# Altium PCB EmphaseMainBoardX.PcbDoc
Units mil, origin at the board's own origin, x right, y up, seen from the top; angles counter-clockwise.
Board outline 6000 x 4000 mil, 2 copper layers (Top Layer, Bottom Layer); 86 components, 128 nets, 468 pads, 0 vias.
Unrouted connection lines stored in the file: 286.
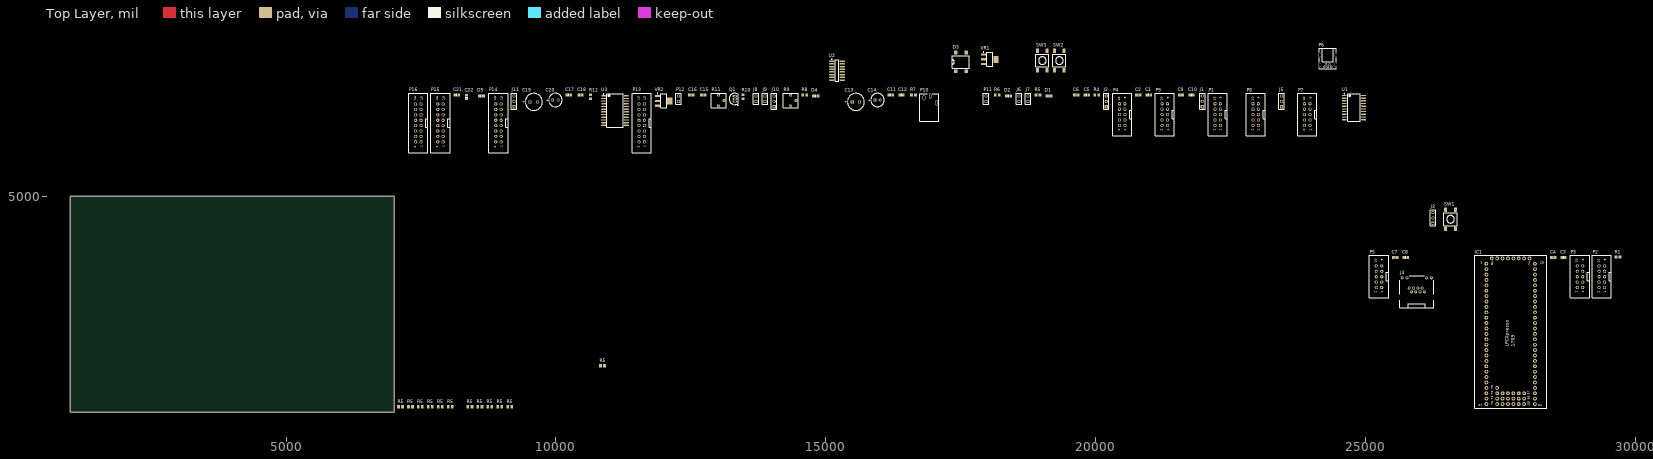
[diagram p0: Top Layer view]
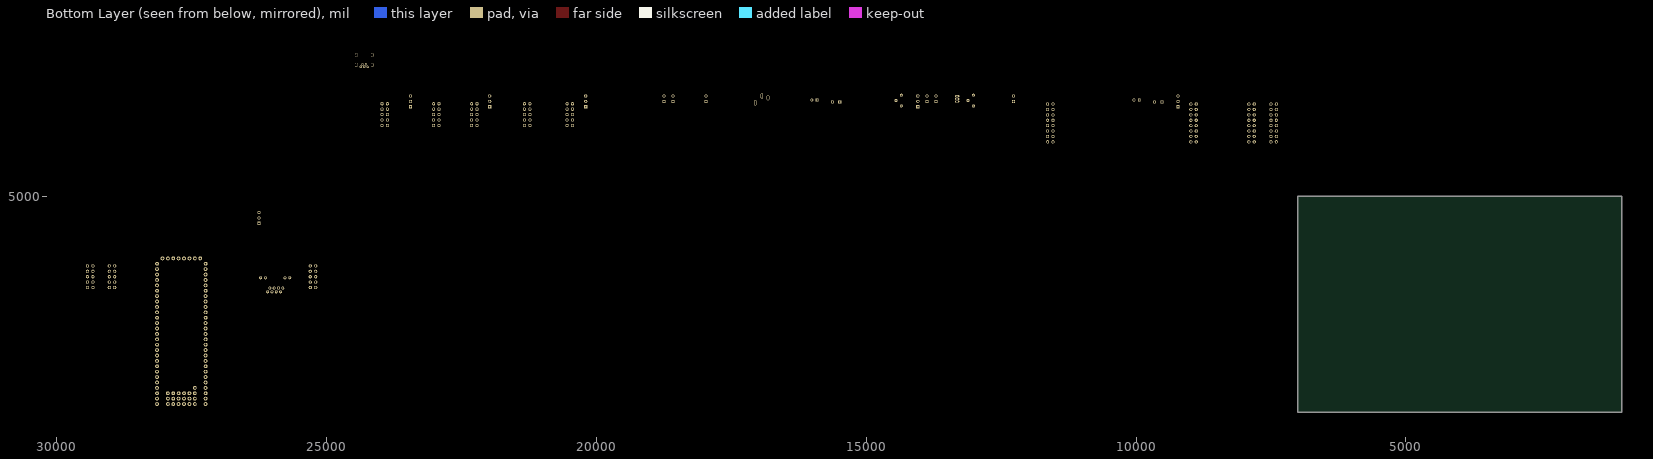
[diagram p1: Bottom Layer view, seen from below]

## Layer stack, top to bottom
Top Layer: signal copper 1.4
Dielectric: dielectric 12.6, FR-4, Dk 4.8
Bottom Layer: signal copper 1.4

## Board outline
1000,1000 7000,1000 7000,5000 1000,5000

## Design rules (kind name [scope] priority, off if disabled: settings)
Clearance [All] p1: gap=10
DiffPairsRouting [All] p1: maxlimit=10 minlimit=10 mostfreqgap=10 maxuncoupledlength=500
Height [All] p1: minheight=0 maxheight=1968.5 prefheight=500
PolygonConnect [All] p1: connectstyle=Relief reliefconductorwidth=10 reliefentries=4 polygonreliefangle="90 Angle" airgapwidth=10
RoomDefinition EmphaseMainBoard [InComponentClass('EmphaseMainBoard')] p1: confinementstyle=ConfineIn formatcopy=TRUE lockcomponents=FALSE outline 7045,1060 9220,1060 9220,1240 7045,1240
RoutingVias [All] p1: holewidth=28 width=50 viastyle="Through Hole" minholewidth=28 minwidth=50 maxholewidth=28 maxwidth=50
SilkscreenOverComponentPads [All] p1: minsilkscreentomaskgap=10
SolderMaskExpansion [All] p1: expansion=4
Width [All] p1: maxlimit=10 minlimit=10 preferedwidth=10
25 further rules are at their usual default settings.

## Classes and differential pairs
net class LCD_D[0..7]: LCD_D0 LCD_D1 LCD_D2 LCD_D3 LCD_D4 LCD_D5 LCD_D6 LCD_D7
net class ADC_0.[0..7]: ADC_0.0 ADC_0.1 ADC_0.2 ADC_0.3 ADC_0.4 ADC_0.5 ADC_0.6 ADC_0.7
component class EmphaseMainBoard: C1 C2 C3 C4 C5 C6 C7 C8 C9 C10 C11 C12 C13 C14 C15 C16 C17 C18 C19 C20 C21 C22 D1 D2 D3 D4 D5 IC1 J1 J2 J3 J4 J5 J6 J7 J8 J9 J10 J11 P1 P2 P3 P4 P5 P6 P7 P8 P9 P10 P11 P12 P13 P14 P15 P16 Q1 R1 R4 R5 R6 R7 R8 R9 R10 R11 R12 SW1 SW2 SW3 U1 U2 U3 VR1 VR2
differential pair USB_D: +USB_D_P -USB_D_N
differential pair ETH_TD: +ETH_TD_P -ETH_TD_N
differential pair ETH_RD: +ETH_RD_P -ETH_RD_N

## Components (designator, comment, footprint, x,y, rotation, side; value= is the part's Value field where it differs from the comment)
C1 "Cap Pol1" 6-0805_N 20985,6875 r0 top
C2 "Cap Semi" 6-0805_N 20795,6875 r0 top
C3 "Cap Semi" 6-0805_N 28675,3870 r0 top
C4 "Cap Pol1" 6-0805_N 28485,3870 r0 top
C5 "Cap Pol1" 6-0805_N 19840,6875 r0 top
C6 "Cap Semi" 6-0805_N 19645,6875 r0 top
C7 "Cap Semi" 6-0805_N 25555,3870 r0 top
C8 "Cap Semi" 6-0805_N 25750,3870 r0 top
C9 "Cap Semi" 6-0805_N 21585,6875 r0 top
C10 "Cap Semi" 6-0805_N 21780,6875 r0 top
C11 "Cap Semi" 6-0805_N 16205,6875 r0 top
C12 "Cap Semi" 6-0805_N 16405,6875 r0 top
C13 "Cap Pol1" CAPPR3.5-8x20 15560,6750 r0 top
C14 "Cap Pol1" CAPPR2.5-6.3x11 15960,6785 r0 top
C15 "Cap Semi" 6-0805_N 12730,6875 r0 top
C16 "Cap Pol1" 6-0805_N 12510,6875 r0 top
C17 "Cap Semi" 6-0805_N 10235,6875 r0 top
C18 "Cap Semi" 6-0805_N 10455,6875 r0 top
C19 "Cap Pol1" CAPPR3.5-8x20 9590,6750 r0 top
C20 "Cap Pol1" CAPPR2.5-6.3x11 9990,6785 r0 top
C21 "Cap Semi" 6-0805_N 8160,6875 r0 top
C22 "Cap Semi" 6-0805_N 8340,6840 r90 top
D1 "LED_Task_Overrun" 6-0805_M 19140,6860 r0 top
D2 "LED_Error" 6-0805_M 18390,6860 r0 top
D3 "Bridge Rectifier" SDIP 17505,7490 r90 top
D4 "LED_5V_Good" 6-0805_M 14815,6860 r0 top
D5 "LED_3V3_Good" 6-0805_M 8620,6860 r0 top
IC1 "" LPCXpresso1769 27695,2450 r0 top
J1 "VSEL_SPARE_A" HDR1X3 21980,6660 r90 top
J2 "VSEL_SPARE_B" HDR1X3 20200,6660 r90 top
J3 "Jumper" HDR1X3 26255,4500 r90 top
J4 "Ethernet" "Amphenol RJ45" 25955,3130 r0 top
J5 "Jumper" HDR1X3 23445,6660 r90 top
J6 "5V InCurrent" HDR1X2 18580,6760 r90 top
J7 "5V OutCurrent" HDR1X2 18750,6760 r90 top
J8 "3.3V InCurrent" HDR1X2 13705,6760 r90 top
J9 "3.3V OutCurrent" HDR1X2 13875,6760 r90 top
J10 "Jumper" HDR1X3 14045,6660 r90 top
J11 "Jumper" HDR1X3 9220,6660 r90 top
P1 "SPARE_A" "10 pol Header" 22265,6515 r90 top
P2 "JTAG" "10 pol Header" 29385,3510 r90 top
P3 "SPARE_UARTS" "10 pol Header" 28980,3510 r90 top
P4 "SPARE_B" "10 pol Header" 20495,6515 r90 top
P5 "DIO" "10 pol Header" 25255,3510 r90 top
P6 "Mini USB" "Mini USB Socket - Typ B" 24305,7400 r0 top
P7 "SPI_ADC" "10 pol Header" 23925,6515 r90 top
P8 "ADC_A" "10 pol Header" 22970,6515 r90 top
P9 "ADC_B" "10 pol Header" 21285,6515 r90 top
P10 "Lumberg Power Con" LumbergPowerCon 16900,6550 r90 top
P11 "5V Supply" HDR1X2 17970,6760 r90 top
P12 "3V3 Supply" HDR1X2 12270,6760 r90 top
P13 "16 pol Header" "16 pol Header" 11590,6360 r90 top
P14 "16 pol Header" "16 pol Header" 8935,6360 r90 top
P15 "16 pol Header" "16 pol Header" 7860,6360 r90 top
P16 "16 pol Header" "16 pol Header" 7450,6360 r90 top
Q1 "BC337" TO-226-AA 13315,6805 r0 top
R1 "Res2" 6-0805 29685,3875 r0 top
R4 "Res2" 6-0805 20025,6880 r0 top
R5 "Res2" 6-0805 9145,1100 r0 top
R5 "Res2" 6-0805 8960,1100 r0 top
R5 "Res2" 6-0805 8775,1100 r0 top
R5 "Res2" 6-0805 8590,1100 r0 top
R5 "Res2" 6-0805 8405,1100 r0 top
R5 "Res2" 6-0805 8040,1100 r0 top
R5 "Res2" 6-0805 10865,1860 r0 top
R5 "Res2" 6-0805 7855,1100 r0 top
R5 "Res2" 6-0805 7670,1100 r0 top
R5 "Res2" 6-0805 7485,1100 r0 top
R5 "Res2" 6-0805 7305,1100 r0 top
R5 "Res2" 6-0805 7120,1100 r0 top
R5 "Res2" 6-0805 18935,6880 r0 top
R6 "Res2" 6-0805 18180,6880 r0 top
R7 "Res2" 6-0805 16625,6880 r0 top
R8 "Res2" 6-0805 14610,6880 r0 top
R9 "Contrast" MiniPot 14450,6775 r0 top
R10 "Res2" 6-0805 13465,6845 r90 top
R11 "Luminance" MiniPot 13115,6775 r0 top
R12 "Res2" 6-0805 10640,6845 r90 top
SW1 "CPU_Reset" "SMD Switch" 26580,4575 r90 top
SW2 "ISP_Reset" "SMD Switch" 19330,7515 r90 top
SW3 "Task_Error_Reset" "SMD Switch" 19015,7515 r90 top
U1 "SN74HC541DW" DW020_N 24790,6645 r0 top
U2 "SN74HC595D" D016_M 15210,7330 r0 top
U3 "SN74HC154DW" SOIC127P1199-24AN 11095,6590 r0 top
VR1 "5 V" SOT223-4N 18040,7540 r0 top
VR2 "3.3 V" SOT223-4N 11995,6770 r0 top

## Footprints (in the part's own frame and the unit in brackets; to place one, negate y for a bottom-side part, rotate by r counter-clockwise, add the part's x,y. Pads: shape width x height; smd on the part's side, far side on the other; paste and mask are expansions set on the pad)
6-0805 [mm] "Chip Resistor; Body 2 x 1.2 mm (LxW typ)"
  rect 1.3x1.5 smd: 1(-0.95,0) 2(0.95,0)
6-0805_M [mm] "Chip Resistor, Body 2.0x1.2mm, IPC Low Density"
  rect 1.4x1.5 smd: 1(-1,0) 2(1,0)
  silkscreen extent 0,-0.65 0,0.65, body extent -1.07,-0.7 1.07,0.7, height 0.7
6-0805_N [mm] "Chip Resistor, Body 2.0x1.2mm, IPC Medium Density"
  rect 1.2x1.4 smd: 1(-0.9,0) 2(0.9,0)
  silkscreen extent 0,-0.6 0,0.6, body extent -1.07,-0.7 1.07,0.7, height 0.7
"10 pol Header" [mm]
  round 1.5 hole 0.9: 1(-5.08,-1.27) 2(-5.08,1.27) 3(-2.54,-1.27) 4(-2.54,1.27) 5(0,-1.27) 6(0,1.27) 7(2.54,-1.27) 8(2.54,1.27) 9(5.08,-1.27) 10(5.08,1.27)
  silkscreen extent -10,-4.5 10,4.5, body extent -10,-4.5 10,4.5, height 9
"16 pol Header" [mm]
  round 1.5 hole 0.9: 1(-8.89,-1.27) 2(-8.89,1.27) 3(-6.35,-1.27) 4(-6.35,1.27) 5(-3.81,-1.27) 6(-3.81,1.27) 7(-1.27,-1.27) 8(-1.27,1.27) 9(1.27,-1.27) 10(1.27,1.27) 11(3.81,-1.27) 12(3.81,1.27) 13(6.35,-1.27) 14(6.35,1.27) 14(8.89,1.27) 15(8.89,-1.27)
  silkscreen extent -14,-4.5 14,4.5, body extent -14,-4.5 14,4.5, height 9
"Amphenol RJ45" [mm]
  round 0 hole 3.3: 0(-6.35,0) 0(6.35,0)
  round 1.4 hole 0.8: 1(3.556,2.54) 2(2.54,4.318) 3(1.524,2.54) 4(0.508,4.318) 5(-0.508,2.54) 6(-1.524,4.318) 7(-2.54,2.54) 8(-3.556,4.318) 9(6.858,9.144) 10(4.572,9.144) 11(-4.572,9.144) 12(-6.858,9.144)
  silkscreen extent -8,-5 8,10
CAPPR2.5-6.3x11 [mm] "Capacitor, Electrolytic, Radial; Body 6.3 x 11 mm (Dia.xH typ); Pin Spacing 2.5 mm (typ)"
  rect 1.35x1.35 hole 0.8: 1(-1.25,0)
  round 1.35 hole 0.8: 2(1.25,0)
  silkscreen extent -3.15,-3.15 3.15,3.15
CAPPR3.5-8x20 [mm] "Capacitor, Electrolytic, Radial; Body 8 x 20 mm (Dia.xH typ); Pin Spacing 3.5 mm (typ)"
  rect 1.5x1.5 hole 0.9: 1(-1.75,0)
  round 1.5 hole 0.9: 2(1.75,0)
  silkscreen extent -4,-4 4,4
D016_M [mm] "SOIC, 16-Leads, Body 9.9x3.9mm, Pitch 1.27mm, IPC Low Density"
  oval 2.5x0.7 smd: 1(-2.45,4.445) 2(-2.45,3.175) 3(-2.45,1.905) 4(-2.45,0.635) 5(-2.45,-0.635) 6(-2.45,-1.905) 7(-2.45,-3.175) 8(-2.45,-4.445) 9(2.45,-4.445) 10(2.45,-3.175) 11(2.45,-1.905) 12(2.45,-0.635) 13(2.45,0.635) 14(2.45,1.905) 15(2.45,3.175) 16(2.45,4.445)
  silkscreen extent -2.57,-5 0.8,5.47, body extent -2,-5 2,5, height 1.75
DW020_N [mm] "SOIC, 20-Leads, Body 12.8x7.5mm, Pitch 1.27mm, IPC Medium Density"
  oval 2.3x0.6 smd: 1(-4.55,5.715) 2(-4.55,4.445) 3(-4.55,3.175) 4(-4.55,1.905) 5(-4.55,0.635) 6(-4.55,-0.635) 7(-4.55,-1.905) 8(-4.55,-3.175) 9(-4.55,-4.445) 10(-4.55,-5.715) 11(4.55,-5.715) 12(4.55,-4.445) 13(4.55,-3.175) 14(4.55,-1.905) 15(4.55,-0.635) 16(4.55,0.635) 17(4.55,1.905) 18(4.55,3.175) 19(4.55,4.445) 20(4.55,5.715)
  silkscreen extent -4.67,-6.5 3,6.69, body extent -3.75,-6.5 3.75,6.5, height 2.65
HDR1X2 [mm] "Connector; Header; 2 Position"
  rect 1.5x1.5 hole 0.9: 1(0,0)
  round 1.5 hole 0.9: 2(2.54,0)
  silkscreen extent -1.27,-1.27 3.81,1.27
HDR1X3 [mm] "Connector; Header; 3 Position"
  rect 1.5x1.5 hole 0.9: 1(0,0)
  round 1.5 hole 0.9: 2(2.54,0) 3(5.08,0)
  silkscreen extent -1.27,-1.27 6.35,1.27
LPCXpresso1769 [mm]
  round 1.8 hole 0.9: 1(-11.43,33.02) 2(-11.43,30.48) 3(-11.43,27.94) 4(-11.43,25.4) 5(-11.43,22.86) 6(-11.43,20.32) 7(-11.43,17.78) 8(-11.43,15.24) 9(-11.43,12.7) 10(-11.43,10.16) 11(-11.43,7.62) 12(-11.43,5.08) 13(-11.43,2.54) 14(-11.43,0) 15(-11.43,-2.54) 16(-11.43,-5.08) 17(-11.43,-7.62) 18(-11.43,-10.16) 19(-11.43,-12.7) 20(-11.43,-15.24) 21(-11.43,-17.78) 22(-11.43,-20.32) 23(-11.43,-25.4) 24(-11.43,-22.86) 25(-11.43,-27.94) 26(-11.43,-30.48) 27(-11.43,-33.02) 28(11.43,33.02) 29(11.43,30.48) 30(11.43,27.94) 31(11.43,25.4) 32(11.43,22.86) 33(11.43,20.32) 34(11.43,17.78) 35(11.43,15.24) 36(11.43,12.7) 37(11.43,10.16) 38(11.43,7.62) 39(11.43,5.08) 40(11.43,2.54) 41(11.43,0) 42(11.43,-2.54) 43(11.43,-5.08) 44(11.43,-7.62) 45(11.43,-10.16) 46(11.43,-12.7) 47(11.43,-15.24) 48(11.43,-17.78) 49(11.43,-20.32) 50(11.43,-22.86) 51(11.43,-25.4) 52(11.43,-27.94) 53(11.43,-30.48) 54(11.43,-33.02) 55(6.35,-33.02) 56(6.35,-30.48) 57(6.35,-27.94) 58(3.81,-33.02) 59(3.81,-30.48) 60(3.81,-27.94) 61(1.27,-33.02) 62(1.27,-30.48) 63(1.27,-27.94) 64(-1.27,-33.02) 65(-1.27,-30.48) 66(-1.27,-27.94) 67(-3.81,-33.02) 68(-3.81,-30.48) 69(-3.81,-27.94) 70(-6.35,-33.02) 71(-6.35,-30.48) 72(-6.35,-27.94) 73(-6.35,-25.4) 74(8.89,35.56) 75(6.35,35.56) 76(3.81,35.56) 77(1.27,35.56) 78(-1.27,35.56) 79(-3.81,35.56) 80(-6.35,35.56) 81(-8.89,35.56)
  silkscreen extent -17,-35 17,37
LumbergPowerCon [mm]
  round 0 hole 1.3: 0(0,0) 0(5,0)
  rrect90% 2.4x1.2 hole 0.6 slot 1.6 at 0 deg: 1(7.9,-0.9) 2(4.6,-4) 3(7,2)
  silkscreen extent -4,-5 9,4
"Mini USB Socket - Typ B" [mm]
  rrect80% 1.2x1.8 hole 0.8 slot 1.4 at 90 deg: 0(-3.725,0.9) 0(3.725,0.9)
  rrect80% 1.2x1.6 hole 0.8 slot 1.2 at 90 deg: 0(-3.725,5.55) 0(3.725,5.55)
  round 1.1 hole 0.6: 1(1.6,0) 2(0.8,1.2) 3(0,0) 4(-0.8,1.2) 5(-1.6,0)
  silkscreen extent -4,-1 4,8.7
MiniPot [mm]
  round 1.4 hole 0.6: CCW(-2.54,-2.54) CW(-2.54,2.54) W(0,0)
  silkscreen extent -6,-3.5 1,3.5
SDIP [mm]
  rrect20% 1.8x1.6 smd: 1(-4.4,2.5) 2(-4.4,-2.5) 3(4.4,-2.5) 4(4.4,2.5)
  silkscreen extent -3,-4 3,4
"SMD Switch" [mm]
  rrect20% 2.1x1.4 smd: 1(-4.55,2.25) 2(4.55,2.25) 3(-4.55,-2.25) 4(4.55,-2.25)
  silkscreen extent -3,-3.1 3,3.1
SOIC127P1199-24AN [mm] "SOIC, 24-Leads, Body 15.8x9mm, Pitch 1.27mm, IPC Medium Density"
  oval 2.3x0.6 smd: 1(-5.35,6.985) 2(-5.35,5.715) 3(-5.35,4.445) 4(-5.35,3.175) 5(-5.35,1.905) 6(-5.35,0.635) 7(-5.35,-0.635) 8(-5.35,-1.905) 9(-5.35,-3.175) 10(-5.35,-4.445) 11(-5.35,-5.715) 12(-5.35,-6.985) 13(5.35,-6.985) 14(5.35,-5.715) 15(5.35,-4.445) 16(5.35,-3.175) 17(5.35,-1.905) 18(5.35,-0.635) 19(5.35,0.635) 20(5.35,1.905) 21(5.35,3.175) 22(5.35,4.445) 23(5.35,5.715) 24(5.35,6.985)
  silkscreen extent -5.47,-7.95 3.8,7.96, body extent -4.51,-8.05 4.51,8.05, height 2.5
SOT223-4N [mm] "SOT223, 4-Leads, Body 6.5x3.5mm, Pitch 2.3mm, Lead Span 7mm, IPC Medium Density"
  rect 2.4x1 smd: 1(-2.9,2.3) 2(-2.9,0) 3(-2.9,-2.3)
  rect 2.4x3.3 smd: 4(2.9,0)
  silkscreen extent -3.02,-3.35 1.4,3.47, body extent -1.85,-3.35 1.85,3.35, height 1.8
TO-226-AA [mm] "TO, Flat Index; 3 In-Line, Axial Leads; Body Dia. 4.8mm; Leads 0.55 x 0.51 mm (max)"
  oval 2x1 hole 0.9: 1(0,-1.27) 2(0,0) 3(0,1.27)
  silkscreen extent -2.65,-3.13 1.52,2.65, body extent -2.66,-2.66 1.52,2.66, height 5.33

## Part data
C1 C4 C5 C13 C14 C16 C19 C20: "Polarized Capacitor (Radial)"
C2 C3 C6 C7 C8 C9 C10 C11 C12 C15 C17 C18 C21 C22: "Capacitor (Semiconductor SIM Model)"
D1 D2 D4 D5: library part LED3, "Typical BLUE SiC LED"
D3: library part "Bridge Rectifiers"
IC1: library part Component_1, "Capacitor (Semiconductor SIM Model)"
J1 J2 J3 J5 J10 J11: library part "Header 3", "Header, 3-Pin"
J4: library part "Amphenol RJ45 Jack", "Amphenol RJ45 Jack"
J6 J7 J8 J9 P11 P12: library part "Header 2", "Header, 2-Pin"
P1 P2 P3 P4 P5 P7 P8 P9: library part "10 pol Header", "10 pol Header"
P6: library part "Mini USB Jack B"
P10: library part "Lumberg Power Connector", "Lumberg Power Connector"
Q1: library part NPN, "NPN Bipolar Transistor"
R1 R4 R5 R5 R5 R5 R5 R5 R5 R5 R5 R5 R5 R5 R5 R6 R7 R8 R10 R12: "Resistor"
R9 R11: library part "RPot SM", "Square Trimming Potentiometer"
SW1 SW2 SW3: library part "Generic SMD Switch"
U1: "Octal Buffer/Driver with 3-State Outputs"
U2: "8-Bit Shift Register with 3-State Output Registers"
U3: "4-Line to 16-Line Decoder / Demultiplexer"
VR1 VR2: library part "Voltage Regulator"

## Nets (pads, with @x,y where several pads share a name; then routed paths per layer and width w, separated by ;. In a path a pad name is that pad's centre, name@x,y a point inside that pad or via, vN(x,y) a via of type N, cw(c..) or ccw(c..) an arc to the next point about the centre after c; other vN are vias at no path point)
3V3: C3.2 C4.1 C9.2 C10.2 IC1.28 IC1.74 J1.1 J2.1 J3.1 J5.1 J9.2 J10.1 J11.1 P8.10 P9.10 P12.1 R4.1
5V: J1.3 J2.3 J3.3 J5.3 J7.2 J10.3 J11.3 P2.1 P11.1 P14.1 P16.1 R8.2 R11.CW
ADC_0.0: IC1.15 P8.1
ADC_0.1: IC1.16 P8.3
ADC_0.2: IC1.17 P8.5
ADC_0.3: IC1.18 P8.7
ADC_0.4: IC1.19 P9.1
ADC_0.5: IC1.20 P9.3
ADC_0.6: IC1.21 P9.5
ADC_0.7: IC1.22 P9.7
DIO_CL: P5.1 U1.18
DIO_CL_A: IC1.7 U1.2
DIO_ID: IC1.6 P5.5
DIO_IG: P5.8 U1.15
DIO_IG_A: IC1.68 U1.5
DIO_OD: P5.3 U1.17
DIO_OD_A: IC1.5 U1.3
DIO_OS: P5.7 U1.16
DIO_OS_A: IC1.8 U1.4
ETH_RD_N: IC1.32 J4.6
ETH_RD_P: IC1.33 J4.3
ETH_TD_N: IC1.34 J4.2
ETH_TD_P: IC1.35 J4.1
GND: C1.2 C2.1 C3.1 C4.2 C5.2 C6.1 C7.1 C8.1 C9.1 C10.1 C11.1 C12.1 C13.2 C14.2 C15.1 C16.2 C17.1 C18.1 C19.2 C20.2 C21.1 C22.1 D1.2 D2.2 D3.2 D4.2 D5.2 IC1.1 IC1.54 IC1.81 P1.9 P2.3 P2.5 P2.9 P3.1 P3.3 P3.5 P3.7 P3.9 P4.9 P5.2 P5.4 P5.6 P5.9 P7.2 P7.4 P7.6 P7.9 P8.2 P8.4 P8.6 P8.8 P8.9 P9.2 P9.4 P9.6 P9.8 P9.9 P11.2 P12.2 P14.15 P16.15 Q1.3 R1.2 R9.CCW R11.CCW SW1.1 SW1.2 SW2.3 SW2.4 SW3.3 SW3.4 U1.1 U1.10 U1.19 U2.8 U3.12 U3.19 VR1.1 VR2.1
JTAG_RST: IC1.79 P2.10
JTAG_RTCK: P2.7 R1.1
JTAG_TCK: IC1.76 P2.4
JTAG_TDI: IC1.78 P2.8
JTAG_TDO: IC1.77 P2.6
JTAG_TMS: IC1.75 P2.2
KEY_0: IC1.42 P13.2 P15.2
KEY_1: IC1.43 P13.4 P15.4
KEY_2: IC1.44 P13.6 P15.6
KEY_3: IC1.45 P13.8 P15.8
KEY_4: IC1.46 P13.10 P15.10
KEY_5: IC1.47 P13.12 P15.12
KEY_6: IC1.48 P13.14 P15.14
KEY_7: IC1.49
LCD1_E: IC1.66 P14.12
LCD2_E: IC1.67 P16.12
LCD_B-: P14.2 P16.2 Q1.1 R8.1
LCD_D0: P14.9 P16.9 U2.15
LCD_D1: P14.10 P16.10 U2.1
LCD_D2: P14.7 P16.7 U2.2
LCD_D3: P14.8 P16.8 U2.3
LCD_D4: P14.5 P16.5 U2.4
LCD_D5: P14.6 P16.6 U2.5
LCD_D6: P14.3 P16.3 U2.6
LCD_D7: IC1.56 P14.4 P16.4 U2.7
LCD_DRIVER_CL: IC1.62 U2.11
LCD_DRIVER_OD: IC1.65 U2.14
LCD_DRIVER_OE: IC1.64 U2.13
LCD_DRIVER_OS: IC1.63 U2.12
LCD_RS: P14.14 P16.14
LCD_RW: P14.11 P16.11 R5.2@9182.4,1100
LCD_V0: P14.13 P16.13 R9.W
LINE_A: IC1.57 U3.23
LINE_B: IC1.58 U3.22
LINE_C: IC1.59 U3.21
LINE_D: IC1.60 U3.20
LINE_EN/DIS: IC1.55 U3.18
NetC1_1: C1.1 C2.2 J1.2 P1.10
NetC5_1: C5.1 C6.2 J2.2 P4.10
NetC7_2: C7.2 C8.2 J3.2 P5.10 P7.10 U1.20
NetC11_2: C11.2 C13.1 J6.2 VR1.3
NetC12_2: C12.2 C14.1 J7.1 R7.2 VR1.2 VR1.4
NetC15_2: C15.2 C16.1 J10.2 U3.24
NetC17_2: C17.2 C19.1 J8.2 VR2.3
NetC18_2: C18.2 C20.1 J9.1 R12.2 VR2.2 VR2.4
NetD1_1: D1.1 R5.1@18897.6,6880
NetD2_1: D2.1 R6.1
NetD3_1: D3.1 J6.1 J8.1
NetD3_3: D3.3 P10.2
NetD3_4: D3.4 P10.1
NetD4_1: D4.1 R7.1
NetD5_1: D5.1 R12.1
NetIC1_4: IC1.4 SW1.3 SW1.4
NetIC1_51: IC1.51 SW2.1 SW2.2
NetIC1_71: IC1.71 R6.2
NetIC1_72: IC1.72 R5.2@18972.4,6880
NetIC1_73: IC1.73 R4.2 SW3.1 SW3.2
NetJ5_2: J5.2
NetP13_1: P13.1 U3.1
NetP13_3: P13.3 U3.2
NetP13_5: P13.5 U3.3
NetP13_7: P13.7 U3.4
NetP13_9: P13.9 U3.5
NetP13_11: P13.11 U3.6
NetP13_13: P13.13 U3.7
NetP13_15: P13.15 U3.8
NetP15_1: P15.1 U3.9
NetP15_3: P15.3 U3.10
NetP15_5: P15.5 U3.11
NetP15_7: P15.7 U3.13
NetP15_9: P15.9 U3.14
NetP15_11: P15.11 U3.15
NetP15_13: P15.13 U3.16
NetP15_15: P15.15 U3.17
NetQ1_2: Q1.2 R10.2
NetR10_1: R10.1 R11.W
RXD2: IC1.41 P3.4
RXD3: IC1.10 P3.8
SPARE_P0.4: IC1.38 P1.1
SPARE_P0.5: IC1.39 P1.2
SPARE_P0.22: IC1.24 P1.3
SPARE_P0.27: IC1.25 P1.4
SPARE_P0.28: IC1.26 P1.5
SPARE_P1.24: IC1.61 P4.5
SPARE_P2.8: IC1.50 P4.1
SPARE_P2.11: IC1.52 P4.2
SPARE_P2.12: IC1.53 P4.3
SPARE_P2.13: IC1.27 P4.4
SPARE_P4.28: IC1.69 P4.6
SPARE_P4.29: IC1.70 P4.7
SPI_ADC_CL: P7.1 U1.14
SPI_ADC_CL_A: IC1.13 U1.6
SPI_ADC_ID: IC1.12 P7.5
SPI_ADC_IG: P7.8 U1.11
SPI_ADC_IG_A: IC1.23 U1.9
SPI_ADC_OD: P7.3 U1.13
SPI_ADC_OD_A: IC1.11 U1.7
SPI_ADC_OS: P7.7 U1.12
SPI_ADC_OS_A: IC1.14 U1.8
TXD2: IC1.40 P3.2
TXD3: IC1.9 P3.6
USB_D_N: IC1.36 P6.2
USB_D_P: IC1.37 P6.3
V_LCD: C21.2 C22.2 J11.2 R5.1@9107.6,1100 R9.CW U2.10 U2.16
pads on no net: IC1.2 IC1.3 IC1.29 IC1.30 IC1.31 IC1.80 J4.0 J4.4 J4.5 J4.7 J4.8 J4.9 J4.10 J4.11 J4.12 P1.6 P1.7 P1.8 P3.10 P4.8 P6.0 P6.1 P6.4 P6.5 P10.0 P10.3 R5.1@7082.6,1100 R5.1@7267.6,1100 R5.1@7447.6,1100 R5.1@7632.6,1100 R5.1@7817.6,1100 R5.1@8002.6,1100 R5.1@8367.6,1100 R5.1@8552.6,1100 R5.1@8737.6,1100 R5.1@8922.6,1100 R5.1@10827.6,1860 R5.2@7157.4,1100 R5.2@7342.4,1100 R5.2@7522.4,1100 R5.2@7707.4,1100 R5.2@7892.4,1100 R5.2@8077.4,1100 R5.2@8442.4,1100 R5.2@8627.4,1100 R5.2@8812.4,1100 R5.2@8997.4,1100 R5.2@10902.4,1860 U2.9

## Text inside footprints (layer, text, board x,y; h text height)
C13: Top Overlay "+" at 15344.45,6720.47 h59.05
C14: Top Overlay "+" at 15777.91,6755.47 h59.06
C19: Top Overlay "+" at 9374.45,6720.47 h59.05
C20: Top Overlay "+" at 9807.91,6755.47 h59.06
IC1: Top Overlay "LPCXpresso" at 27655.63,2213.78 h60 r90; Top Overlay "1769" at 27773.74,2213.78 h60 r90; Top Overlay "1" at 27143.82,3749.21 h39.37; Top Overlay "27" at 27104.45,1111.42 h39.37; Top Overlay "54" at 28206.81,1111.42 h39.37; Top Overlay "28" at 28246.18,3749.21 h39.37; Top Overlay "55" at 28045,1125 h39.37 r90; Top Overlay "56" at 28045,1225 h39.37 r90; Top Overlay "57" at 28045,1325 h39.37 r90; Top Overlay "72" at 27370,1325 h39.37 r90; Top Overlay "71" at 27370,1225 h39.37 r90; Top Overlay "70" at 27370,1125 h39.37 r90; Top Overlay "73" at 27370,1425 h39.37 r90; Top Overlay "74" at 28070,3725 h39.37 r90; Top Overlay "81" at 27370,3725 h39.37 r90
P1: Top Overlay "1" at 22343.74,6219.72 h39.37 r90; Top Overlay "2" at 22225.63,6219.72 h39.37 r90; Top Overlay "9" at 22343.74,6806.34 h39.37 r90; Top Overlay "10" at 22225.63,6774.84 h39.37 r90
P2: Top Overlay "1" at 29463.74,3214.72 h39.37 r90; Top Overlay "2" at 29345.63,3214.72 h39.37 r90; Top Overlay "9" at 29463.74,3801.34 h39.37 r90; Top Overlay "10" at 29345.63,3769.84 h39.37 r90
P3: Top Overlay "1" at 29058.74,3214.72 h39.37 r90; Top Overlay "2" at 28940.63,3214.72 h39.37 r90; Top Overlay "9" at 29058.74,3801.34 h39.37 r90; Top Overlay "10" at 28940.63,3769.84 h39.37 r90
P4: Top Overlay "1" at 20573.74,6219.72 h39.37 r90; Top Overlay "2" at 20455.63,6219.72 h39.37 r90; Top Overlay "9" at 20573.74,6806.34 h39.37 r90; Top Overlay "10" at 20455.63,6774.84 h39.37 r90
P5: Top Overlay "1" at 25333.74,3214.72 h39.37 r90; Top Overlay "2" at 25215.63,3214.72 h39.37 r90; Top Overlay "9" at 25333.74,3801.34 h39.37 r90; Top Overlay "10" at 25215.63,3769.84 h39.37 r90
P7: Top Overlay "1" at 24003.74,6219.72 h39.37 r90; Top Overlay "2" at 23885.63,6219.72 h39.37 r90; Top Overlay "9" at 24003.74,6806.34 h39.37 r90; Top Overlay "10" at 23885.63,6774.84 h39.37 r90
P8: Top Overlay "1" at 23048.74,6219.72 h39.37 r90; Top Overlay "2" at 22930.63,6219.72 h39.37 r90; Top Overlay "9" at 23048.74,6806.34 h39.37 r90; Top Overlay "10" at 22930.63,6774.84 h39.37 r90
P9: Top Overlay "1" at 21363.74,6219.72 h39.37 r90; Top Overlay "2" at 21245.63,6219.72 h39.37 r90; Top Overlay "9" at 21363.74,6806.34 h39.37 r90; Top Overlay "10" at 21245.63,6774.84 h39.37 r90
P13: Top Overlay "1" at 11668.74,5907.24 h39.37 r90; Top Overlay "2" at 11550.63,5897.4 h39.37 r90; Top Overlay "15" at 11668.74,6783.23 h39.37 r90; Top Overlay "16" at 11550.63,6783.23 h39.37 r90
P14: Top Overlay "1" at 9013.74,5907.24 h39.37 r90; Top Overlay "2" at 8895.63,5897.4 h39.37 r90; Top Overlay "15" at 9013.74,6783.23 h39.37 r90; Top Overlay "16" at 8895.63,6783.23 h39.37 r90
P15: Top Overlay "1" at 7938.74,5907.24 h39.37 r90; Top Overlay "2" at 7820.63,5897.4 h39.37 r90; Top Overlay "15" at 7938.74,6783.23 h39.37 r90; Top Overlay "16" at 7820.63,6783.23 h39.37 r90
P16: Top Overlay "1" at 7528.74,5907.24 h39.37 r90; Top Overlay "2" at 7410.63,5897.4 h39.37 r90; Top Overlay "15" at 7528.74,6783.23 h39.37 r90; Top Overlay "16" at 7410.63,6783.23 h39.37 r90